# EAGLE board p8x-bustest-card-full (EAGLE 9.6.2)
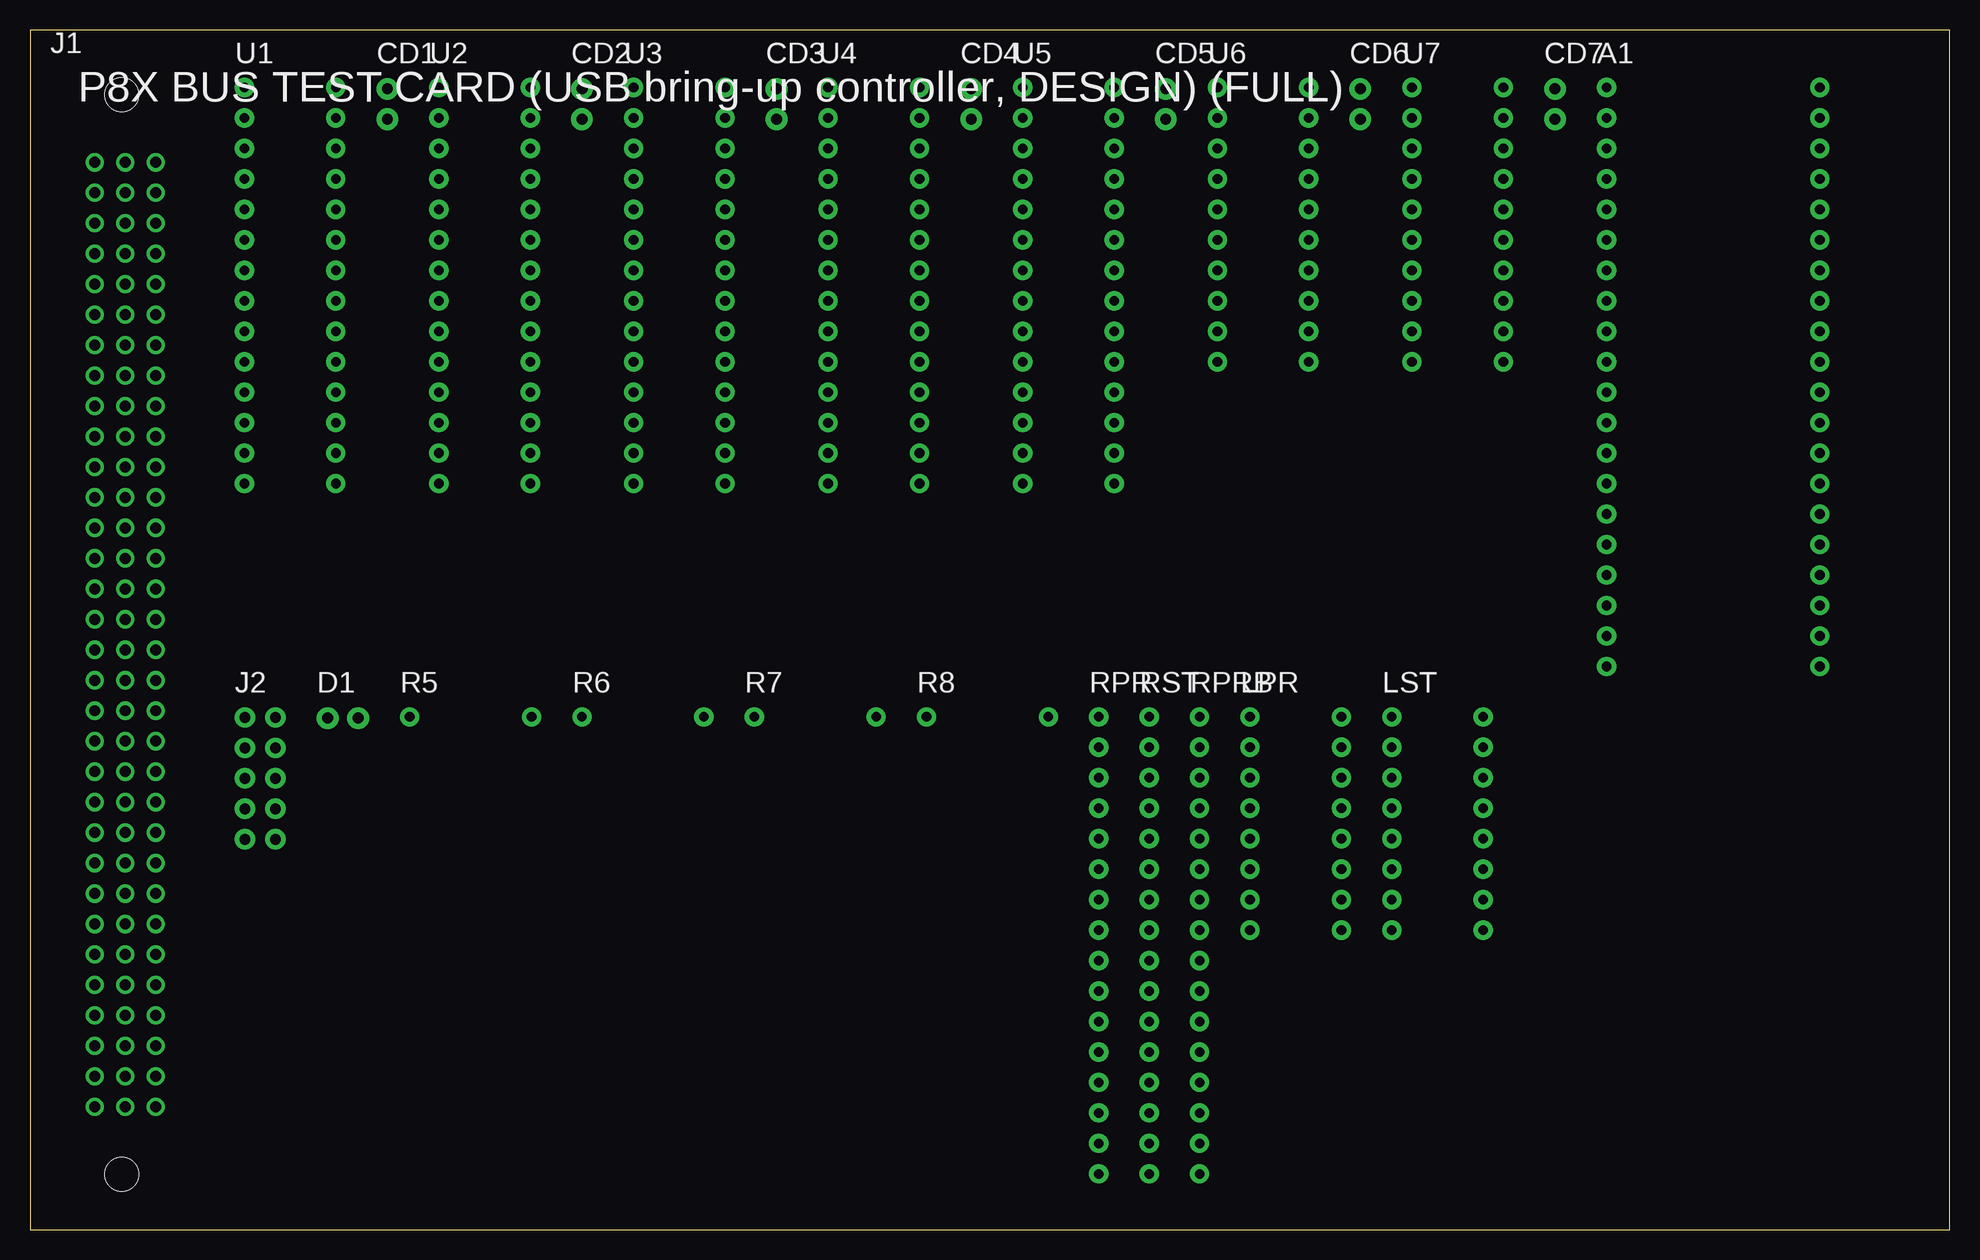
[diagram p0: board, top side]
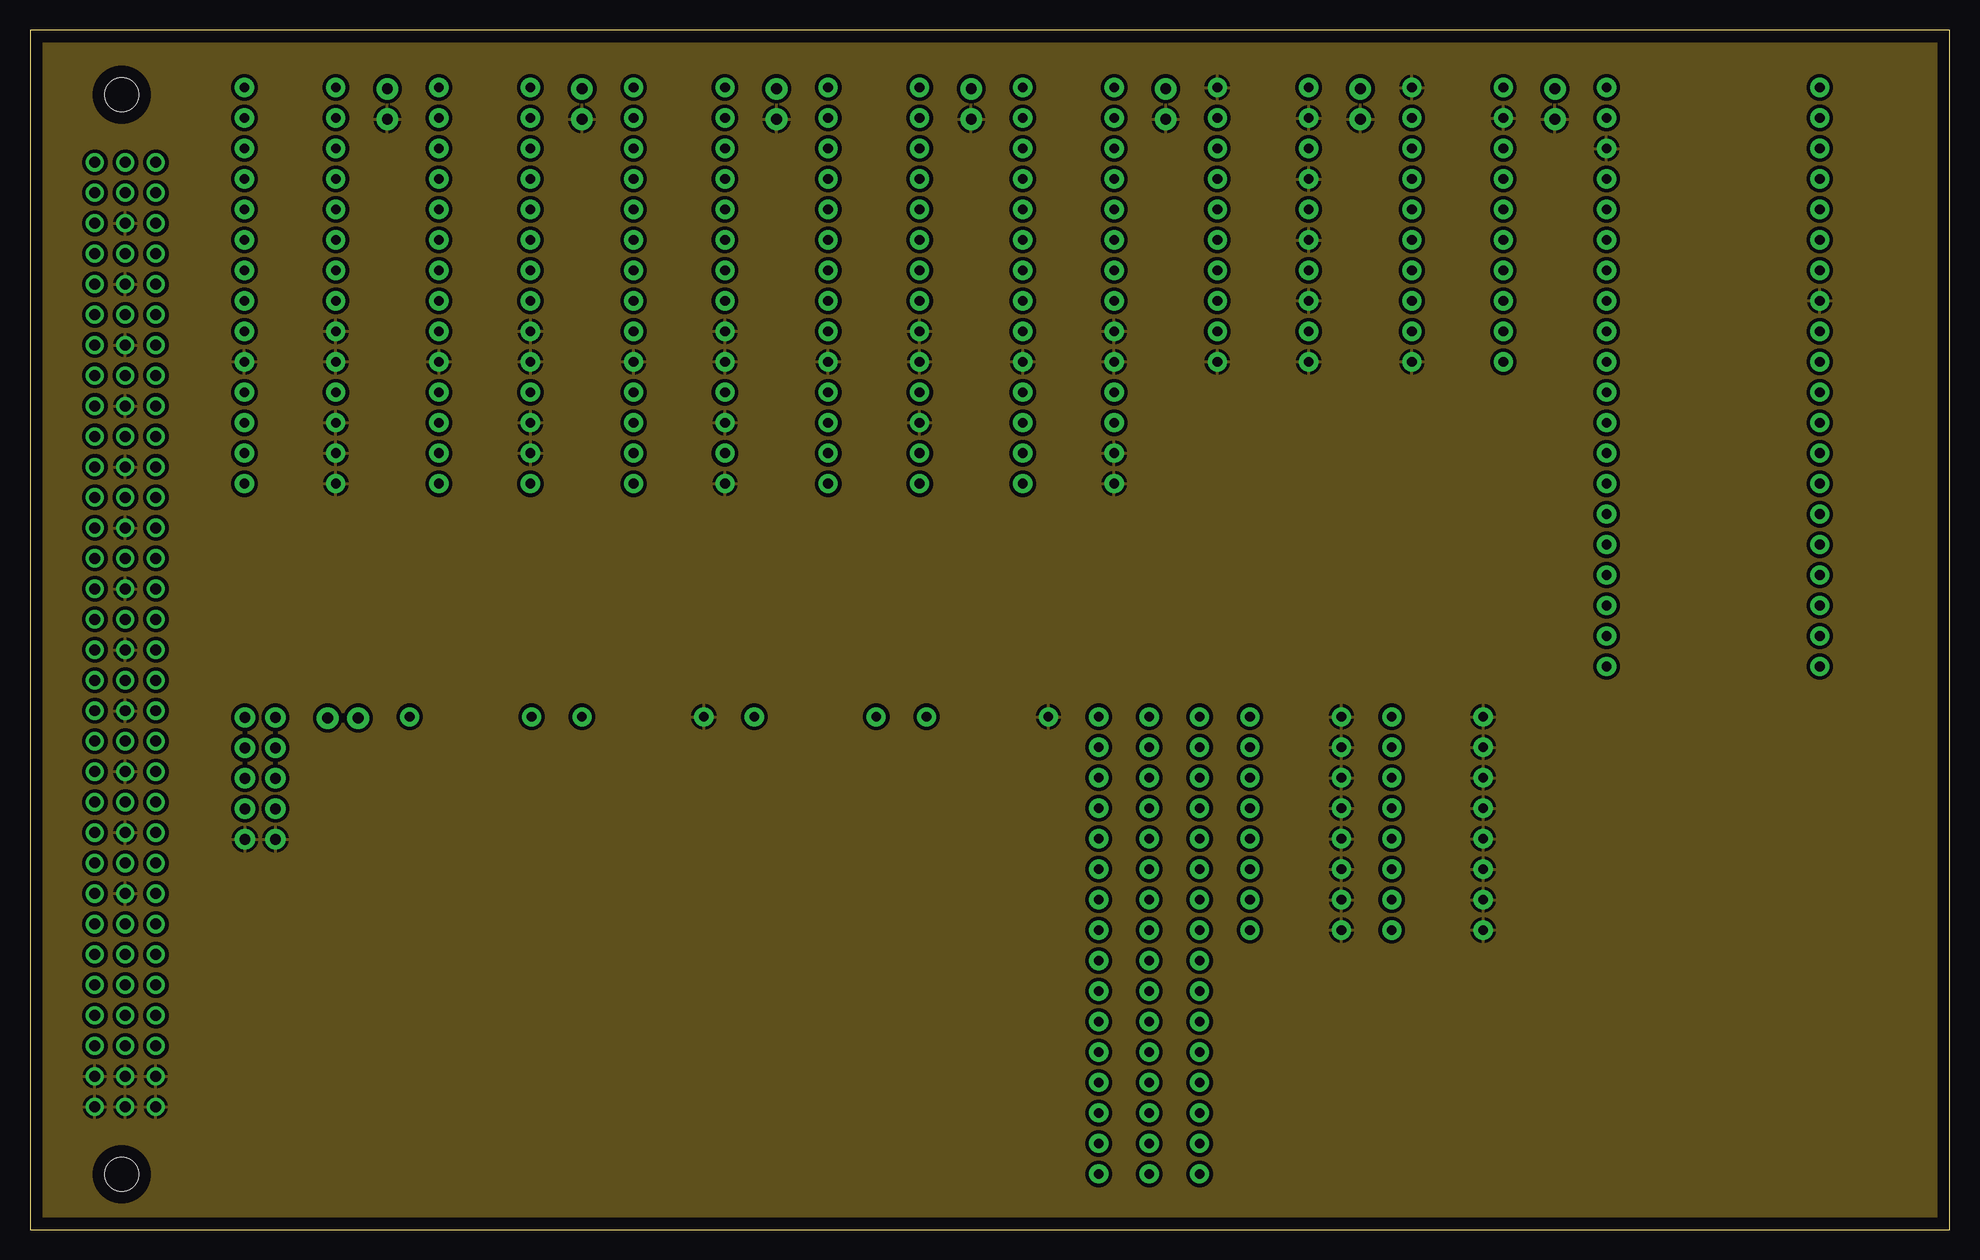
[diagram p1: board, inner layer Route2]
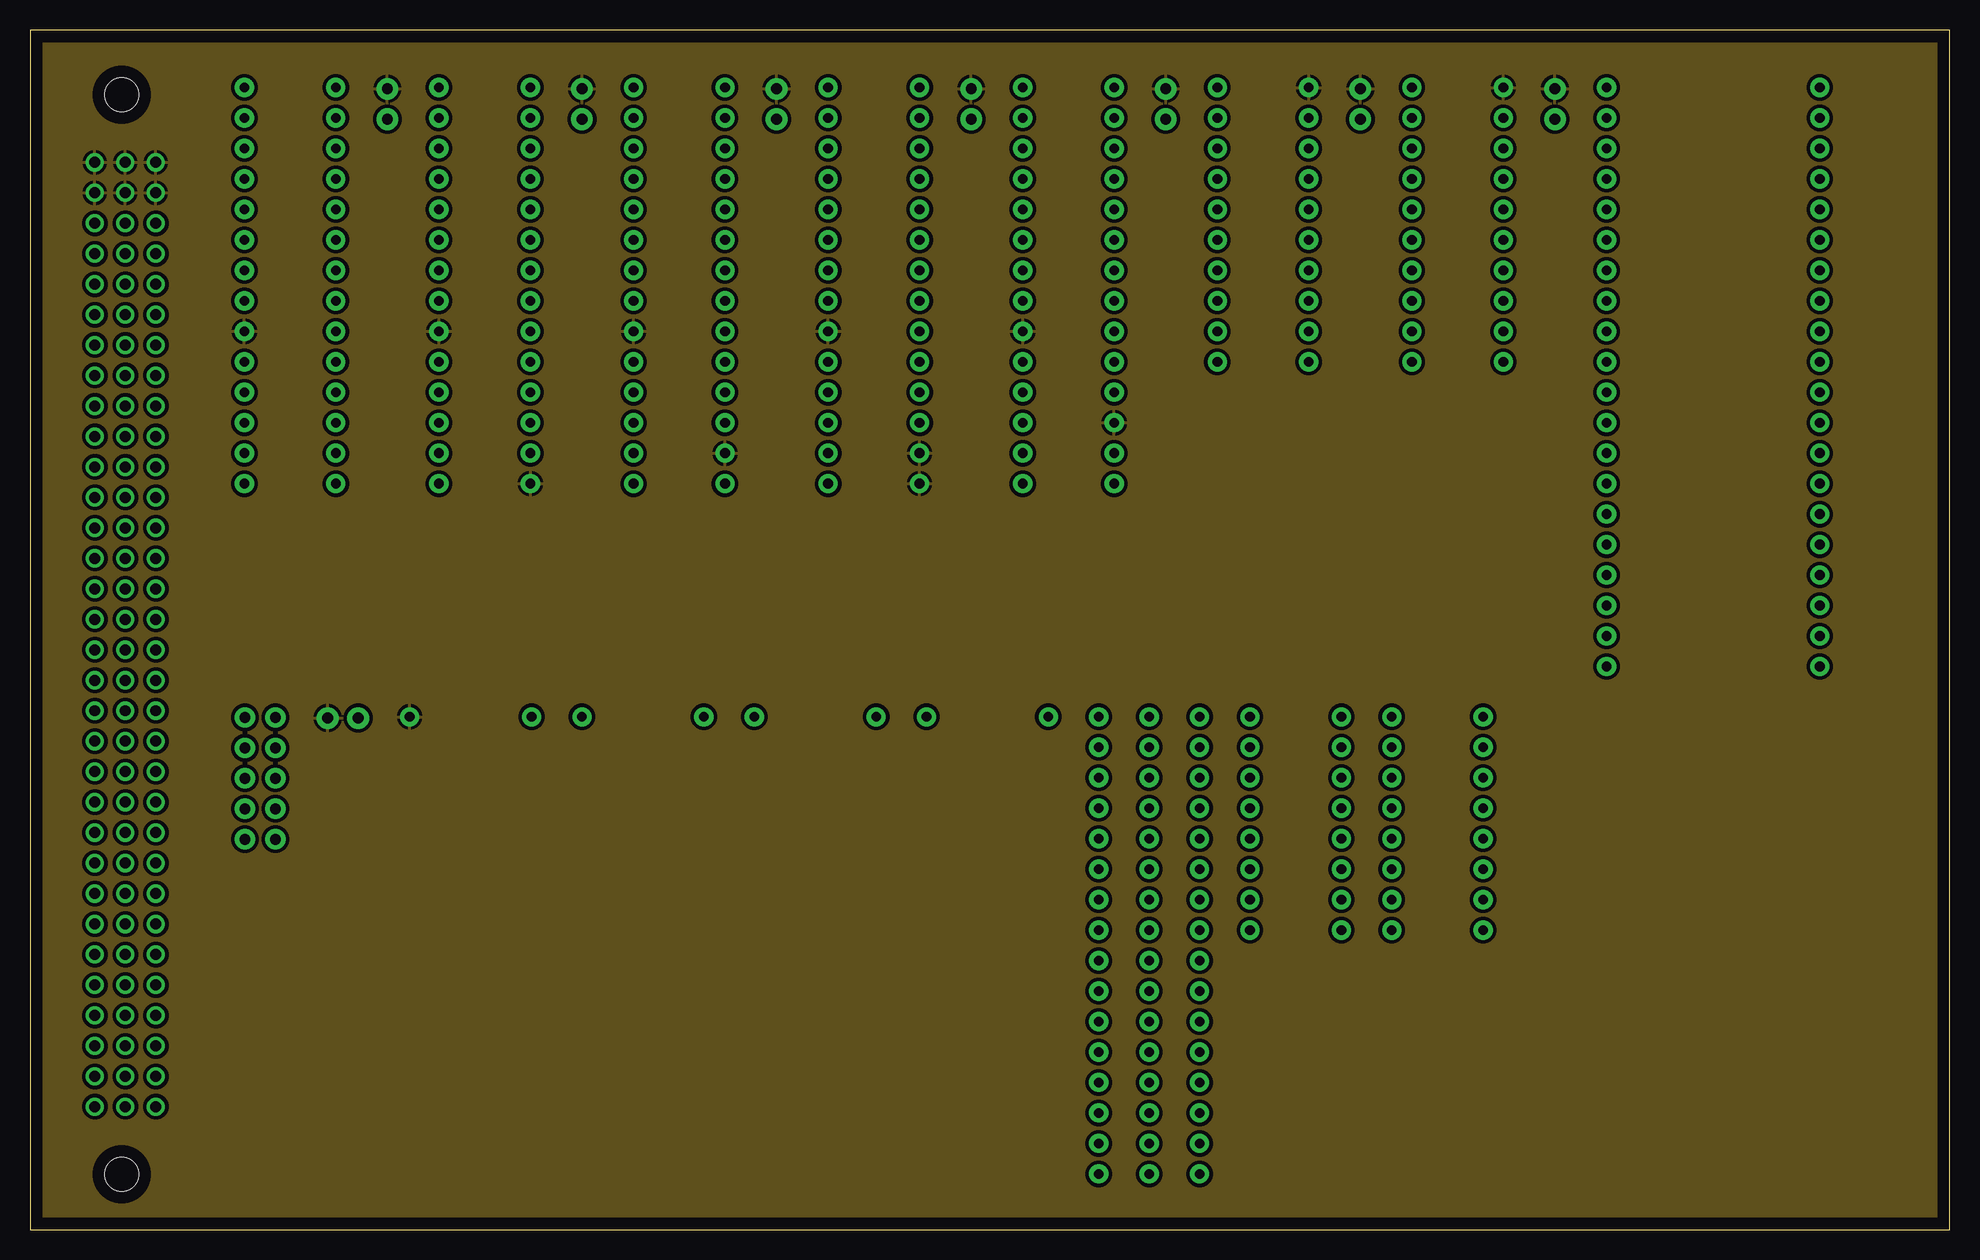
[diagram p2: board, inner layer Route15]

Size 160 x 100 mm. Coordinates in mm from the lower left corner, seen from the top.
Outline: 0,0 160,0 160,100 0,100 0,0
Copper layers (1*2*15*16): Top / Route2 / Route15 / Bottom

## Footprints (pad centres in the part's own frame; a part is rotated, then mirrored left to right if it is on the bottom)
PICO40 = drill 0.813 pad 1.6: 1 0,0; 2 0,-2.54; 3 0,-5.08; 4 0,-7.62; 5 0,-10.16; 6 0,-12.7; 7 0,-15.24; 8 0,-17.78; 9 0,-20.32; 10 0,-22.86; 11 0,-25.4; 12 0,-27.94; 13 0,-30.48; 14 0,-33.02; 15 0,-35.56; 16 0,-38.1; 17 0,-40.64; 18 0,-43.18; 19 0,-45.72; 20 0,-48.26; 21 17.78,-48.26; 22 17.78,-45.72; 23 17.78,-43.18; 24 17.78,-40.64; 25 17.78,-38.1; 26 17.78,-35.56; 27 17.78,-33.02; 28 17.78,-30.48; 29 17.78,-27.94; 30 17.78,-25.4; 31 17.78,-22.86; 32 17.78,-20.32; 33 17.78,-17.78; 34 17.78,-15.24; 35 17.78,-12.7; 36 17.78,-10.16; 37 17.78,-7.62; 38 17.78,-5.08; 39 17.78,-2.54; 40 17.78,0
C_DISC1 = drill 0.9 pad 1.8: 1 0,0; 2 0,-2.54
LED5 = drill 0.9 pad 1.8: 1 2.54,0; 2 0,0
MABC96R = drill 0.914 pad 1.524: A1 -2.54,39.37; A2 -2.54,36.83; A3 -2.54,34.29; A4 -2.54,31.75; A5 -2.54,29.21; A6 -2.54,26.67; A7 -2.54,24.13; A8 -2.54,21.59; A9 -2.54,19.05; A10 -2.54,16.51; A11 -2.54,13.97; A12 -2.54,11.43; A13 -2.54,8.89; A14 -2.54,6.35; A15 -2.54,3.81; A16 -2.54,1.27; A17 -2.54,-1.27; A18 -2.54,-3.81; A19 -2.54,-6.35; A20 -2.54,-8.89; A21 -2.54,-11.43; A22 -2.54,-13.97; A23 -2.54,-16.51; A24 -2.54,-19.05; A25 -2.54,-21.59; A26 -2.54,-24.13; A27 -2.54,-26.67; A28 -2.54,-29.21; A29 -2.54,-31.75; A30 -2.54,-34.29; A31 -2.54,-36.83; A32 -2.54,-39.37; B1 0,39.37; B2 0,36.83; B3 0,34.29; B4 0,31.75; B5 0,29.21; B6 0,26.67; B7 0,24.13; B8 0,21.59; B9 0,19.05; B10 0,16.51; B11 0,13.97; B12 0,11.43; B13 0,8.89; B14 0,6.35; B15 0,3.81; B16 0,1.27; B17 0,-1.27; B18 0,-3.81; B19 0,-6.35; B20 0,-8.89; B21 0,-11.43; B22 0,-13.97; B23 0,-16.51; B24 0,-19.05; B25 0,-21.59; B26 0,-24.13; B27 0,-26.67; B28 0,-29.21; B29 0,-31.75; B30 0,-34.29; B31 0,-36.83; B32 0,-39.37; C1 2.54,39.37; C2 2.54,36.83; C3 2.54,34.29; C4 2.54,31.75; C5 2.54,29.21; C6 2.54,26.67; C7 2.54,24.13; C8 2.54,21.59; C9 2.54,19.05; C10 2.54,16.51; C11 2.54,13.97; C12 2.54,11.43; C13 2.54,8.89; C14 2.54,6.35; C15 2.54,3.81; C16 2.54,1.27; C17 2.54,-1.27; C18 2.54,-3.81; C19 2.54,-6.35; C20 2.54,-8.89; C21 2.54,-11.43; C22 2.54,-13.97; C23 2.54,-16.51; C24 2.54,-19.05; C25 2.54,-21.59; C26 2.54,-24.13; C27 2.54,-26.67; C28 2.54,-29.21; C29 2.54,-31.75; C30 2.54,-34.29; C31 2.54,-36.83; C32 2.54,-39.37 | hole 2.794: -0.3,45; -0.3,-45
HDR10 = drill 0.9 pad 1.7: 1 0,0; 2 2.54,0; 3 0,-2.54; 4 2.54,-2.54; 5 0,-5.08; 6 2.54,-5.08; 7 0,-7.62; 8 2.54,-7.62; 9 0,-10.16; 10 2.54,-10.16
DIP16 = drill 0.813 pad 1.6: 1 0,0; 2 0,-2.54; 3 0,-5.08; 4 0,-7.62; 5 0,-10.16; 6 0,-12.7; 7 0,-15.24; 8 0,-17.78; 9 7.62,-17.78; 10 7.62,-15.24; 11 7.62,-12.7; 12 7.62,-10.16; 13 7.62,-7.62; 14 7.62,-5.08; 15 7.62,-2.54; 16 7.62,0
R_AXIAL = drill 0.8 pad 1.6: 1 0,0; 2 10.16,0
SIP16 = drill 0.8 pad 1.6: 1 0,-2.54; 2 0,-5.08; 3 0,-7.62; 4 0,-10.16; 5 0,-12.7; 6 0,-15.24; 7 0,-17.78; 8 0,-20.32; 9 0,-22.86; 10 0,-25.4; 11 0,-27.94; 12 0,-30.48; 13 0,-33.02; 14 0,-35.56; 15 0,-38.1; 16 0,-40.64
DIP28N = drill 0.813 pad 1.6: 1 0,0; 2 0,-2.54; 3 0,-5.08; 4 0,-7.62; 5 0,-10.16; 6 0,-12.7; 7 0,-15.24; 8 0,-17.78; 9 0,-20.32; 10 0,-22.86; 11 0,-25.4; 12 0,-27.94; 13 0,-30.48; 14 0,-33.02; 15 7.62,-33.02; 16 7.62,-30.48; 17 7.62,-27.94; 18 7.62,-25.4; 19 7.62,-22.86; 20 7.62,-20.32; 21 7.62,-17.78; 22 7.62,-15.24; 23 7.62,-12.7; 24 7.62,-10.16; 25 7.62,-7.62; 26 7.62,-5.08; 27 7.62,-2.54; 28 7.62,0
DIP20 = drill 0.813 pad 1.6: 1 0,0; 2 0,-2.54; 3 0,-5.08; 4 0,-7.62; 5 0,-10.16; 6 0,-12.7; 7 0,-15.24; 8 0,-17.78; 9 0,-20.32; 10 0,-22.86; 11 7.62,-22.86; 12 7.62,-20.32; 13 7.62,-17.78; 14 7.62,-15.24; 15 7.62,-12.7; 16 7.62,-10.16; 17 7.62,-7.62; 18 7.62,-5.08; 19 7.62,-2.54; 20 7.62,0

## Placement (x,y rotation side)
A1  RP2040  [PICO40]  131.41,95.2 0 top
CD1  100nF  [C_DISC1]  29.79,95.1 0 top
CD2  100nF  [C_DISC1]  46.01,95.1 0 top
CD3  100nF  [C_DISC1]  62.23,95.1 0 top
CD4  100nF  [C_DISC1]  78.45,95.1 0 top
CD5  100nF  [C_DISC1]  94.67,95.1 0 top
CD6  100nF  [C_DISC1]  110.89,95.1 0 top
CD7  100nF  [C_DISC1]  127.11,95.1 0 top
D1  SCHOTTKY  [LED5]  24.81,42.64 0 top
J1  MABC96R  [MABC96R]  7.94,49.6 0 top
J2  PROBE 2x5  [HDR10]  17.92,42.69 0 top
LPR  PROBES  [DIP16]  101.69,42.74 0 top
LST  STATUS  [DIP16]  113.51,42.74 0 top
R5  10K  [R_AXIAL]  31.65,42.74 0 top
R6  10K  [R_AXIAL]  46.01,42.74 0 top
R7  1K8  [R_AXIAL]  60.37,42.74 0 top
R8  3K3  [R_AXIAL]  74.73,42.74 0 top
RPR  8x330R  [SIP16]  89.09,45.28 0 top
RPRB  8x1K  [SIP16]  97.49,45.28 0 top
RST  8x330R  [SIP16]  93.29,45.28 0 top
U1  MCP23S17  [DIP28N]  17.87,95.2 0 top
U2  MCP23S17  [DIP28N]  34.09,95.2 0 top
U3  MCP23S17  [DIP28N]  50.31,95.2 0 top
U4  MCP23S17  [DIP28N]  66.53,95.2 0 top
U5  MCP23S17  [DIP28N]  82.75,95.2 0 top
U6  74HCT244  [DIP20]  98.97,95.2 0 top
U7  74HCT244  [DIP20]  115.19,95.2 0 top

## Library data of the parts
A1 CD1-CD7 D1 J1 J2 LPR LST R5-R8 RPR RPRB RST U1-U7 = p8x

## Nets
-IRQ: U4.27
-RES: J1.A11 U3.28
A0: J1.C3 U1.1
A1: J1.C4 U1.2
A2: J1.C5 U1.3
A3: J1.C6 U1.4
A4: J1.C7 U1.5
A5: J1.C8 U1.6
A6: J1.C9 U1.7
A7: J1.C10 U1.8
A8: J1.C11 U2.21
A9: J1.C12 U2.22
A10: J1.C13 U2.23
A11: J1.C14 U2.24
A12: J1.C15 U2.25
A13: J1.C16 U2.26
A14: J1.C17 U2.27
A15: J1.C18 U2.28
ALUM: J1.C23 U3.5
ALUS0: J1.C19 U3.1
ALUS1: J1.C20 U3.2
ALUS2: J1.C21 U3.3
ALUS3: J1.C22 U3.4
BSEL: J1.B28 U4.25
CIN: J1.C24 U3.6
CLK: J1.A24 U3.26
CLKB: J1.A25 U3.27
CLRC: J1.B27 U4.24
CS5: U1.11 U2.11 U3.11 U4.11 U5.11 U6.14
D0: J1.A3 U1.21
D1: J1.A4 U1.22
D2: J1.A5 U1.23
D3: J1.A6 U1.24
D4: J1.A7 U1.25
D5: J1.A8 U1.26
D6: J1.A9 U1.27
D7: J1.A10 U1.28
DLD0: J1.A16 U2.5
DLD1: J1.A17 U2.6
DLD2: J1.A18 U2.7
DLD3: J1.A19 U2.8
DOE0: J1.A12 U2.1
DOE1: J1.A13 U2.2
DOE2: J1.A14 U2.3
DOE3: J1.A15 U2.4
FC: J1.A27 U4.1
FN: J1.A29 U4.3
FV: J1.A30 U4.4
FZ: J1.A28 U4.2
GND: A1.3 A1.33 CD1.2 CD2.2 CD3.2 CD4.2 CD5.2 CD6.2 CD7.2 J1.A31 J1.A32 J1.B3 J1.B5 J1.B7 J1.B9 J1.B11 J1.B13 J1.B15 J1.B17 J1.B19 J1.B21 J1.B23 J1.B25 J1.B31 J1.B32 J1.C31 J1.C32 J2.9 J2.10 LPR.9 LPR.10 LPR.11 LPR.12 LPR.13 LPR.14 LPR.15 LPR.16 LST.9 LST.10 LST.11 LST.12 LST.13 LST.14 LST.15 LST.16 R6.2 R8.2 U1.10 U1.15 U1.16 U1.17 U1.19 U1.20 U2.10 U2.16 U2.17 U2.19 U2.20 U3.10 U3.15 U3.17 U3.19 U3.20 U4.10 U4.17 U4.19 U4.20 U5.10 U5.15 U5.16 U5.19 U5.20 U6.1 U6.10 U6.11 U6.13 U6.15 U6.17 U6.19 U7.1 U7.10 U7.19
L_PR0: RPR.1 U7.18
L_PR1: RPR.3 U7.16
L_PR2: RPR.5 U7.14
L_PR3: RPR.7 U7.12
L_PR4: RPR.9 U7.9
L_PR5: RPR.11 U7.7
L_PR6: RPR.13 U7.5
L_PR7: RPR.15 U7.3
LDF: J1.A26 U4.21
LDZN: J1.C28 U4.22
LK_PR0: LPR.1 RPR.2
LK_PR1: LPR.2 RPR.4
LK_PR2: LPR.3 RPR.6
LK_PR3: LPR.4 RPR.8
LK_PR4: LPR.5 RPR.10
LK_PR5: LPR.6 RPR.12
LK_PR6: LPR.7 RPR.14
LK_PR7: LPR.8 RPR.16
P5V: A1.39 D1.1
P_CS: A1.7 U6.6
P_MISO: A1.6 R7.2 R8.1
P_RST: A1.9 U6.8
P_SCK: A1.4 U6.2
P_SI: A1.5 U6.4
PDEC: J1.A23 U3.25
PINC: J1.A22 U3.24
PR0: RPRB.1 U5.21 U7.2
PR1: RPRB.3 U5.22 U7.4
PR2: RPRB.5 U5.23 U7.6
PR3: RPRB.7 U5.24 U7.8
PR4: RPRB.9 U5.25 U7.11
PR5: RPRB.11 U5.26 U7.13
PR6: RPRB.13 U5.27 U7.15
PR7: RPRB.15 U5.28 U7.17
PRJ0: J2.1 RPRB.2
PRJ1: J2.2 RPRB.4
PRJ2: J2.3 RPRB.6
PRJ3: J2.4 RPRB.8
PRJ4: J2.5 RPRB.10
PRJ5: J2.6 RPRB.12
PRJ6: J2.7 RPRB.14
PRJ7: J2.8 RPRB.16
PSEL0: J1.A20 U3.21
PSEL1: J1.A21 U3.22
PSEL2: J1.C27 U3.23
RST5: U1.18 U2.18 U3.18 U4.18 U5.18 U6.12
SCK5: U1.12 U2.12 U3.12 U4.12 U5.12 U6.18
SENSE5: A1.31 R5.2 R6.1
SETC: J1.C30 U4.23
SH0: J1.C25 U3.7
SH1: J1.C26 U3.8
SHCIN: J1.C29 U4.26
SI5: U1.13 U2.13 U3.13 U4.13 U5.13 U6.16
SO5: R7.1 U1.14 U2.14 U3.14 U4.14 U5.14
SPARE12: U5.1
SPARE13: U5.2
SPARE14: U5.3
SPARE15: U5.4
SPARE16: U5.5
SPARE17: U5.6
ST0: A1.10 RST.1
ST1: A1.11 RST.3
ST2: A1.12 RST.5
ST3: A1.14 RST.7
ST4: A1.15 RST.9
ST5: A1.16 RST.11
ST6: A1.17 RST.13
ST7: A1.19 RST.15
STK0: LST.1 RST.2
STK1: LST.2 RST.4
STK2: LST.3 RST.6
STK3: LST.4 RST.8
STK4: LST.5 RST.10
STK5: LST.6 RST.12
STK6: LST.7 RST.14
STK7: LST.8 RST.16
VCC: CD1.1 CD2.1 CD3.1 CD4.1 CD5.1 CD6.1 CD7.1 D1.2 J1.A1 J1.A2 J1.B1 J1.B2 J1.C1 J1.C2 R5.1 U1.9 U2.9 U2.15 U3.9 U3.16 U4.9 U4.15 U4.16 U5.9 U5.17 U6.20 U7.20

## Tracks (layer width: path | path; a pad name or v marks a point on that pad's centre or on a via)
GND
  pour Route2 (isolate 0.3): 0,0 160,0 160,100 0,100
VCC
  pour Route15 (isolate 0.3): 0,0 160,0 160,100 0,100

## Text on the board
tPlace: P8X BUS TEST CARD (USB bring-up controller, DESIGN) (FULL)